# EAGLE board prese_sonde (EAGLE 4.16)
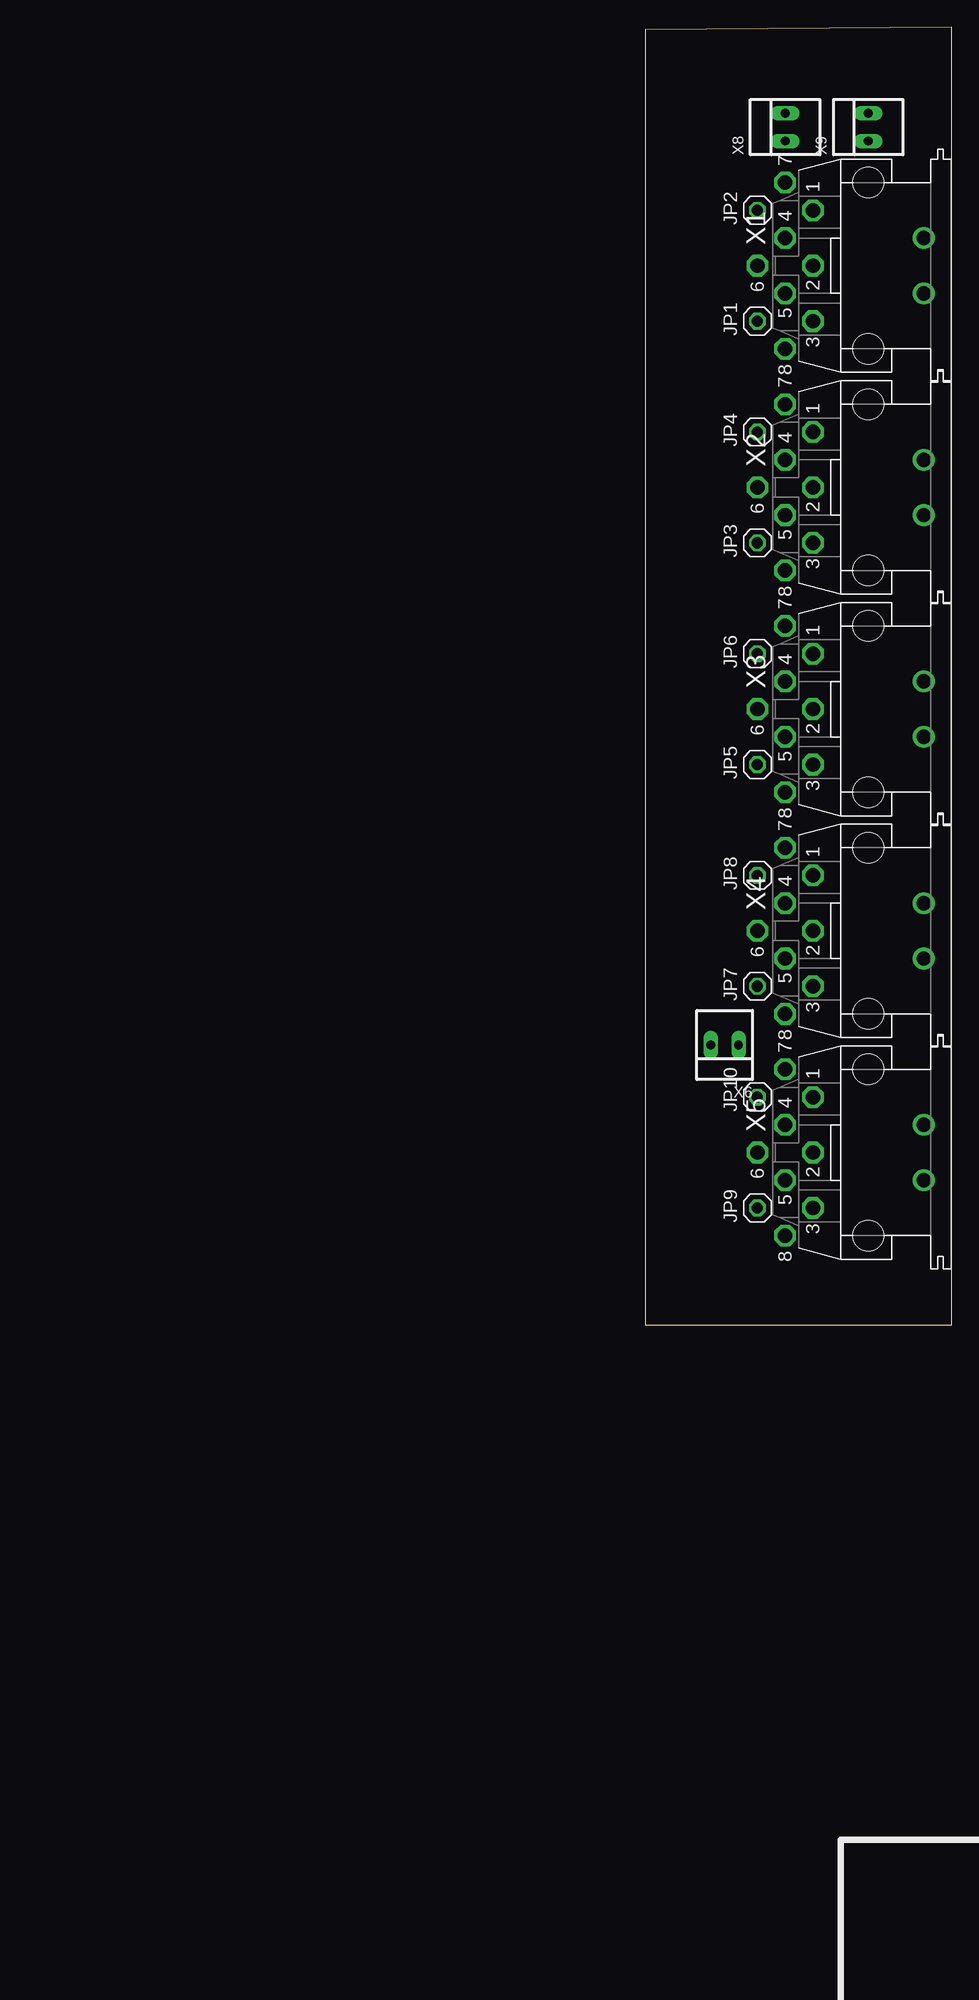
[diagram p0: board, top side]
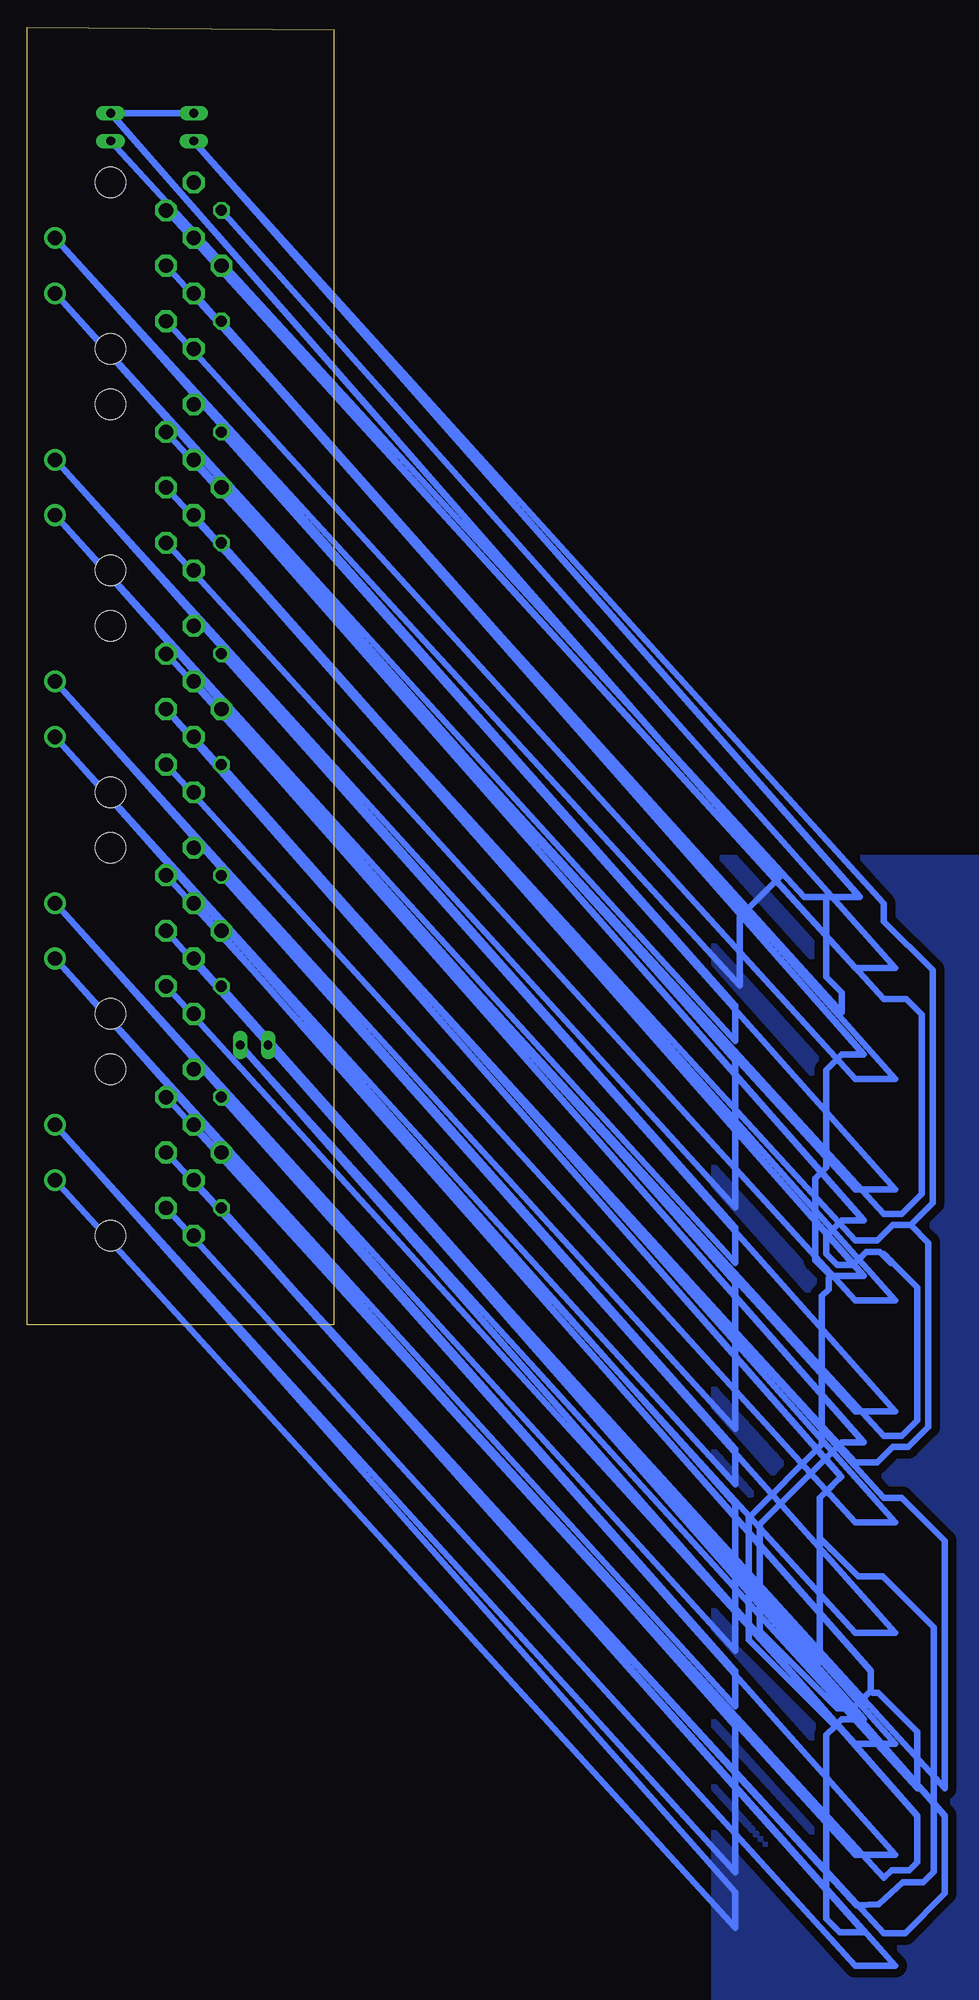
[diagram p1: board, bottom side, seen from below]

Size 28.07 x 118.95 mm. Coordinates in mm from the lower left corner, seen from the top.
Outline: 28.07,0 28.07,118.95 0,118.75 0,0 28.07,0
Copper layers (1*16): Top 0.035mm / dielectric 1.5mm / Bottom 0.035mm
Design rules "mio": minimum track width 24mil, minimum drill 24mil, track to track 30mil, track to pad 30mil, pad to pad 30mil, via to via 30mil, smd to smd 16mil, copper to edge 24mil, drill to drill 16mil, minimum pad ring 10mil, minimum via ring 8mil, stop-mask expansion 16mil, vias tented up to drill 0mil, thermal gap 16mil

## Footprints (pad centres in the part's own frame; a part is rotated, then mirrored left to right if it is on the bottom)
1X01 = drill 1.016 octagon: 1 0,0
MAB8SH = drill 1.321 octagon: 1 5.08,5.08; 2 0,5.08; 3 -5.08,5.08; 4 2.54,7.62; 5 -2.54,7.62; 6 0,10.16; 7 7.62,7.62; 8 -7.62,7.62 | drill 1.321 round: PE -2.54,-5.08; PE@ 2.54,-5.08 | hole 2.794: -7.62,0; 7.62,0
22-23-2021 = drill 0.813 long: 1 -1.27,0; 2 1.27,0

## Placement (x,y rotation side)
JP1  [1X01]  10.27,92.02 90 top
JP2  [1X01]  10.27,102.18 90 top
JP3  [1X01]  10.27,71.7 90 top
JP4  [1X01]  10.27,81.86 90 top
JP5  [1X01]  10.27,51.38 90 top
JP6  [1X01]  10.27,61.54 90 top
JP7  [1X01]  10.27,31.06 90 top
JP8  [1X01]  10.27,41.22 90 top
JP9  [1X01]  10.27,10.74 90 top
JP10  [1X01]  10.27,20.9 90 top
U$1  [A4P-LOC]  -67.81,-70.69 0 top  (outside the outline)
X1  MAB8SH  [MAB8SH]  20.43,97.1 90 top
X2  MAB8SH  [MAB8SH]  20.43,76.78 90 top
X3  MAB8SH  [MAB8SH]  20.43,56.46 90 top
X4  MAB8SH  [MAB8SH]  20.43,36.14 90 top
X5  MAB8SH  [MAB8SH]  20.43,15.82 90 top
X6  22-23-2021  [22-23-2021]  7.28,25.67 180 top
X8  22-23-2021  [22-23-2021]  12.81,109.8 90 top
X9  22-23-2021  [22-23-2021]  20.43,109.8 90 top

## Library data of the parts
JP1-JP10 = pinhead
U$1 = frames
X1-X5 = con-hirschmann
X6 X8 X9 = con-molex

## Nets
GND: X1.PE X1.PE@ X2.PE X2.PE@ X3.PE X3.PE@ X4.PE X4.PE@ X5.PE X5.PE@ X8.2 X9.2
N$1: X1.2 X2.2 X3.2 X4.2 X5.2 X8.1 X9.1
N$2: JP2.1 X1.1
N$3: JP4.1 X2.1
N$4: JP6.1 X3.1
N$5: X1.5 X2.5 X3.5 X4.5 X5.5 X6.2
N$7: X1.4 X2.4 X3.4 X4.4 X5.4 X6.1
N$8: JP8.1 X4.1
N$10: JP1.1 X1.3
N$11: JP5.1 X3.3
N$12: JP3.1 X2.3
N$13: JP7.1 X4.3
N$14: JP9.1 X5.3
N$16: JP10.1 X5.1

## Tracks (layer width: path | path; a pad name or v marks a point on that pad's centre or on a via)
GND
  Bottom 0.61: X8.2 X9.2 -40.88,41.07 -37.22,37.41 -37.22,31.11 X1.PE@ -36.82,29.28 -36.82,26.03 X1.PE -36.82,24.2 -36.82,10.79 X2.PE@ -36.82,8.96 -36.82,5.71 X2.PE -36.82,3.88 -36.82,-9.53 X3.PE@ -36.82,-11.36 -36.82,-14.61 X3.PE -36.82,-16.44 -36.82,-29.85 X4.PE@ -36.82,-31.68 -36.82,-34.93 X4.PE -36.82,-36.76 -36.82,-50.17 X5.PE@ -36.82,-52 -36.82,-55.25 X5.PE
  pour Bottom: -34.89,-64.9 -34.89,42.79 -61.1,42.79 -61.1,-64.9
N$1
  Bottom 0.61: -45.15,39.24 -48.2,39.24 X8.1 -50.43,38.63 -50.43,37 -54.9,32.53 -54.9,11.2 -52.87,9.16 | -45.15,39.24 -43.12,39.24 X9.1 | X1.2 -46.57,28.67 -46.57,30.5 -45.15,31.92 -45.15,39.24 | -52.87,9.16 -51.24,9.16 -49.82,7.74 -47.79,7.74 X2.2 | -52.87,9.16 -54.5,7.54 -54.5,-9.33 -52.67,-11.16 -51.24,-11.16 -49.82,-12.58 -47.79,-12.58 X3.2 -46.52,-13.9 -45.99,-14.43 | -45.99,-14.43 -45.5,-14.91 | X5.2 -47.89,-53.17 -49.97,-53.07 -52.16,-51.08 -54.04,-51.08 -55,-50.12 -55,-27.72 -50.33,-23.04 -48.09,-23.04 -45.55,-20.5 | -45.55,-20.5 -45.5,-20.5 | X4.2 -44.54,-30.87 -44.54,-19.49 | -45.99,-14.43 -45.96,-14.41 -44.54,-15.83 -44.54,-19.49 | -45.55,-20.5 -44.54,-19.49
N$2
  Bottom 0.61: JP2.1 -51.45,32.74 -47.79,32.74 X1.1
N$3
  Bottom 0.61: JP4.1 -51.45,12.42 -47.79,12.42 X2.1
N$4
  Bottom 0.61: JP6.1 -51.45,-7.9 -47.79,-7.9 X3.1
N$5
  Bottom 0.61: -45.55,4.49 -48.6,4.49 X2.5 | -45.55,4.49 -44.13,5.91 -44.13,13.43 -45.15,14.45 -45.15,23.39 -46.57,24.81 -48.6,24.81 X1.5 | -45.96,-36.76 -46.57,-36.15 -48.6,-36.15 X4.5 | -45.96,-36.76 -45.15,-37.57 -45.15,-54.44 -46.37,-55.66 -48.6,-55.66 X5.5 -50.43,-55.76 -52.36,-55.76 -56.02,-52.1 -56.02,-44.99 X6.2 -56.02,-42.45 -56.02,-19.79 -52.06,-15.83 -50.43,-15.83 X3.5 | -45.55,4.49 -45.35,4.29 -45.35,3.27 -44.74,2.66 -44.74,-10.95 -38.04,-17.66 -38.04,-28.83 -45.96,-36.76
N$7
  Bottom 0.61: X1.4 -50.43,29.89 -52.46,29.89 -53.89,28.47 -53.89,12.01 -52.06,10.18 -50.43,10.18 X2.4 -48.6,9.57 -46.57,9.57 -45.15,8.15 -45.15,6.52 -46.16,5.51 -47.59,5.51 -48.81,6.73 -50.02,6.73 -50.23,6.52 -50.43,6.52 -50.43,6.32 -50.63,6.32 -50.63,6.12 -50.84,6.12 -50.84,5.91 -51.04,5.91 -51.04,5.71 -51.24,5.71 -53.48,3.47 -53.48,-8.72 -52.06,-10.14 -50.43,-10.14 X3.4 -48.6,-10.75 -46.57,-10.75 -39.05,-18.27 -39.05,-28.02 -46.16,-35.13 -47.59,-35.13 -49.21,-33.51 | -49.21,-33.51 -49.21,-31.68 X4.4 | X5.4 -50.43,-50.68 -51.14,-49.97 -52.77,-49.97 -53.48,-49.26 -53.48,-44.99 X6.1 -53.48,-42.45 -53.48,-37.27 -49.92,-33.71 -49.42,-33.71 -49.21,-33.51
N$8
  Bottom 0.61: JP8.1 -51.45,-28.22 -47.79,-28.22 X4.1
N$10
  Bottom 0.61: JP1.1 -51.45,22.58 -47.79,22.58 X1.3
N$11
  Bottom 0.61: JP5.1 -51.45,-18.06 -47.79,-18.06 X3.3
N$12
  Bottom 0.61: JP3.1 -51.45,2.26 -47.79,2.26 X2.3
N$13
  Bottom 0.61: JP7.1 -51.45,-38.38 -47.79,-38.38 X4.3
N$14
  Bottom 0.61: JP9.1 -51.45,-58.7 -47.79,-58.7 X5.3
N$16
  Bottom 0.61: JP10.1 -51.45,-48.54 -47.79,-48.54 X5.1